# EAGLE board MOTOR_DRIVER (EAGLE 8.0.1)
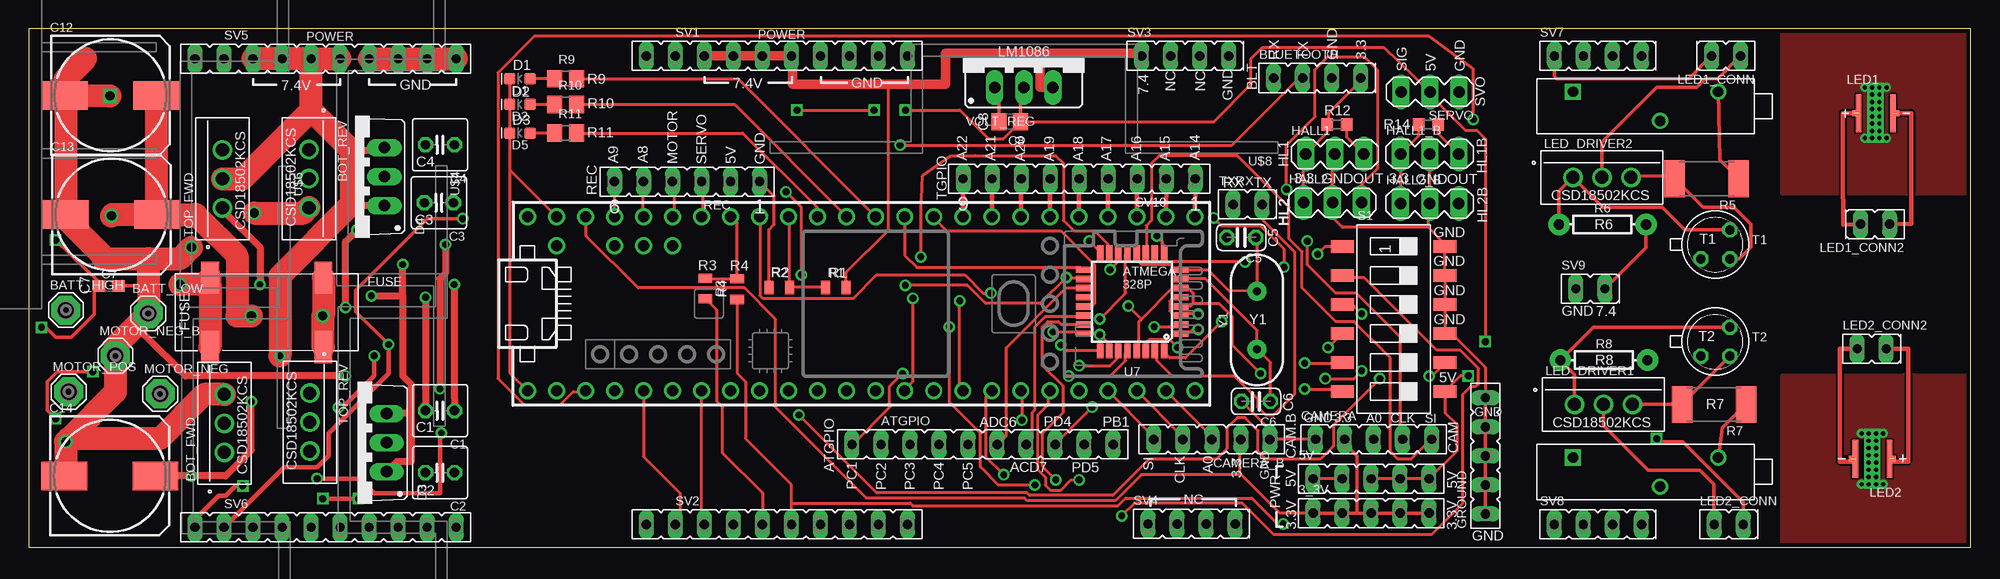
[diagram p0: board, top side]
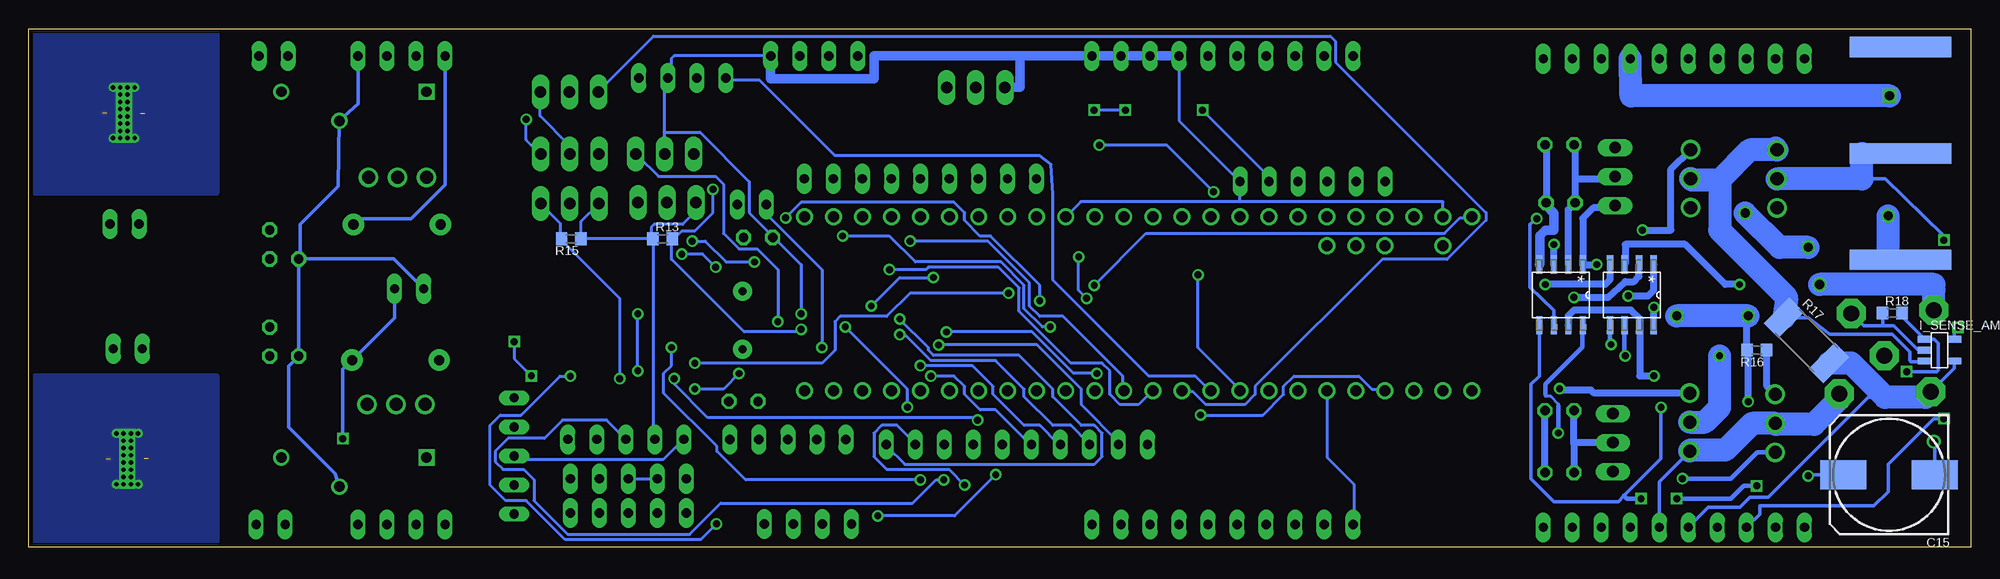
[diagram p1: board, bottom side, seen from below]

Size 170 x 45.39 mm. Coordinates in mm from the lower left corner, seen from the top.
Outline: 0,0 170,0 170,45.39 0,45.39 0,0
Copper layers (1*16): Top 0.035559375mm / dielectric 1.501140625mm / Bottom 0.035559375mm
Design rules "typical_4pcb *": minimum track width 6mil, minimum drill 15mil, track to track 6mil, track to pad 6mil, pad to pad 6mil, via to via 6mil, smd to smd 6mil, copper to edge 15mil, drill to drill 8mil, minimum pad ring 10mil, minimum via ring 8mil, stop-mask expansion 4mil, vias tented up to drill 0mil, thermal gap 10mil
Net classes: 0 default: width 0.152 mm, drill 0.381 mm, clearance 0.152 mm

## Footprints (pad centres in the part's own frame; a part is rotated, then mirrored left to right if it is on the bottom)
FE05-1 = drill 0.813 long: 1 -5.08,0; 2 -2.54,0; 3 0,0; 4 2.54,0; 5 5.08,0
FE10 = drill 0.813 long: 1 -11.43,0; 2 -8.89,0; 3 -6.35,0; 4 -3.81,0; 5 -1.27,0; 6 1.27,0; 7 3.81,0; 8 6.35,0; 9 8.89,0; 10 11.43,0
SE14 = drill 1.397 pad 2.54 octagon: MP 0,0
BIGSWITCH = smd 1.778 x 8.89 bottom: GND 4.65,0; NC 13.97,0; VCC -4.65,0
FE04-1 = drill 0.813 long: 1 -5.08,0; 2 -2.54,0; 3 0,0; 4 2.54,0
KCS3 = drill 1.143 pad 1.651: 1 -5.08,0; 2 -2.54,0; 3 0,0
C025-050X050 = drill 0.813 octagon: 1 -1.27,0; 2 1.27,0
C025-024X044 = drill 0.813 octagon: 1 -1.27,0; 2 1.27,0
C0603 = smd 1.1 x 1: 1 -0.85,0; 2 0.85,0
C0805 = smd 1.3 x 1.5: 1 -0.95,0; 2 0.95,0
153CLV-1010 = smd 4 x 2.5: + 4,0; - -4,0
LED-0603 = smd 1 x 1: A -0.877,0; C 0.877,0
TO220ABS = drill 1.016 long: A1 -2.54,-2.54; A2 2.54,-2.54; C 0,-2.54
FUSEHOLDER3588 = smd 1.57 x 2.82: A -4.96,3.03; B 4.96,3.03; C -4.96,-3.03; D 4.96,-3.03
SOIC-8_M = smd 1.6 x 0.533: 1 -2.654,1.905; 2 -2.654,0.635; 3 -2.654,-0.635; 4 -2.654,-1.905; 5 2.654,-1.905; 6 2.654,-0.635; 7 2.654,0.635; 8 2.654,1.905
MA03-1 = drill 1.016 long: 1 -2.54,0; 2 0,0; 3 2.54,0
SOT23-5 = smd 0.6 x 1.2: 1 -0.95,-1.306; 2 0,-1.306; 3 0.95,-1.306; 4 0.95,1.306; 5 -0.95,1.306
XP = smd 0.5 x 3.3: NEGATIVE 1.5,0; POSITIVE -1.5,0 | smd 0.4 x 0.5: NEGATIVE1 1.85,0; POSITIVE1 -1.85,0 | smd 1.3 x 3.3: THERMAL 0,0
FE02-1 = drill 0.813 long: 1 -5.08,0; 2 -2.54,0
0805 = smd 0.8 x 1.2: 1 -0.9,0; 2 0.9,0
R2512 = smd 1.8 x 3.2: 1 -2.8,0; 2 2.8,0
AXIAL-0.3 = drill 0.9 pad 1.88: P$1 -3.81,0; P$2 3.81,0
R0805 = smd 1.3 x 1.5: 1 -0.95,0; 2 0.95,0
R0603 = smd 1 x 1.1: 1 -0.85,0; 2 0.85,0
FE06 = drill 0.813 long: 1 -6.35,0; 2 -3.81,0; 3 -1.27,0; 4 1.27,0; 5 3.81,0; 6 6.35,0
SMS-006 = smd 1.092 x 2.007: 1 -6.35,-4.496; 2 -3.81,-4.496; 3 -1.27,-4.496; 4 1.27,-4.496; 5 3.81,-4.496; 6 6.35,-4.496; 7 6.35,4.496; 8 3.81,4.496; 9 1.27,4.496; 10 -1.27,4.496; 11 -3.81,4.496; 12 -6.35,4.496
FE09 = drill 0.813 long: 1 -10.16,0; 2 -7.62,0; 3 -5.08,0; 4 -2.54,0; 5 0,0; 6 2.54,0; 7 5.08,0; 8 7.62,0; 9 10.16,0
TO18 = drill 0.813 octagon: 1 -1.27,-1.27; 2 1.27,-1.27; 3 1.27,1.27
TQFP32-08 = smd 1.27 x 0.559: 1 -4.293,2.8; 2 -4.293,2; 3 -4.293,1.2; 4 -4.293,0.4; 5 -4.293,-0.4; 6 -4.293,-1.2; 7 -4.293,-2; 8 -4.293,-2.8; 17 4.293,-2.8; 18 4.293,-2; 19 4.293,-1.2; 20 4.293,-0.4; 21 4.293,0.4; 22 4.293,1.2; 23 4.293,2; 24 4.293,2.8 | smd 0.559 x 1.27: 9 -2.8,-4.293; 10 -2,-4.293; 11 -1.2,-4.293; 12 -0.4,-4.293; 13 0.4,-4.293; 14 1.2,-4.293; 15 2,-4.293; 16 2.8,-4.293; 25 2.8,4.293; 26 2,4.293; 27 1.2,4.293; 28 0.4,4.293; 29 -0.4,4.293; 30 -1.2,4.293; 31 -2,4.293; 32 -2.8,4.293
TEENSY_3.5/3.6_BASIC = drill 0.965: 0/RX -25.4,-7.62; 1/TX -22.86,-7.62; 2 -20.32,-7.62; 3/CANTX -17.78,-7.62; 3V3 7.62,-7.62; 3V3_LO -22.86,7.62; 4/CANRX -15.24,-7.62; 5 -12.7,-7.62; 6 -10.16,-7.62; 7 -7.62,-7.62; 8 -5.08,-7.62; 9/CS -2.54,-7.62; 10/CS 0,-7.62; 11/MOSI 2.54,-7.62; 12/MISO 5.08,-7.62; 13/SCK 5.08,7.62; 14/A0 2.54,7.62; 15/A1 0,7.62; 16/A2 -2.54,7.62; 17/A3 -5.08,7.62; 18/A4/SDA -7.62,7.62; 19/A5/SCL -10.16,7.62; 20/A6 -12.7,7.62; 21/A7 -15.24,7.62; 21/DAC0 12.7,7.62; 22/A8 -17.78,7.62; 23/A9 -20.32,7.62; 24 10.16,-7.62; 25 12.7,-7.62; 26 15.24,-7.62; 27 17.78,-7.62; 28 20.32,-7.62; 29 22.86,-7.62; 30 25.4,-7.62; 31/A12 27.94,-7.62; 32/A13 30.48,-7.62; 33/A14 30.48,7.62; 34/A15 27.94,7.62; 35/A16 25.4,7.62; 36/A17 22.86,7.62; 37/A18 20.32,7.62; 38/A19 17.78,7.62; 39/A20 15.24,7.62; A10 -17.78,5.08; A11 -15.24,5.08; A22/DAC1 10.16,7.62; AGND -25.4,7.62; AREF -20.32,5.08; GND -27.94,-7.62; GND2 7.62,7.62; VIN -27.94,7.62; VUSB -25.4,5.08
POT = drill 0.9 square: P1 1.145,3.175 | drill 0.9: P2 3.685,10.795; P3 1.145,15.875
TO220S = drill 1.016 long: 1 -2.54,-2.54; 2 0,-2.54; 3 2.54,-2.54
HC49US = drill 0.7 pad 1.651: 1 -2.54,0; 2 2.54,0

## Placement (x,y rotation side)
3_3V  [FE05-1]  117.5,3 0 top
5V  [FE05-1]  117.5,6 0 top
ATGPIO  [FE10]  83.5,9 0 top
BATT_HIGH  SE14  [SE14]  3.27,20.76 0 top
BATT_LOW  SE14  [SE14]  10.47,20.46 0 top
BIG_SWITCH  [BIGSWITCH]  6.16,29.81 90 top
BLUETOOTH  [FE04-1]  114.05,41.07 0 top
BOT_FWD  CSD18502KCS_KCS_3  [KCS3]  17.14,13.39 90 top
BOT_REV  CSD18502KCS_KCS_3  [KCS3]  24.54,29.72 270 top
C1  10uF  [C025-050X050]  36.01,11.96 180 top
C2  10uF  [C025-050X050]  36.01,6.54 180 top
C3  10uF  [C025-050X050]  35.91,30.15 180 top
C4  10uF  [C025-050X050]  36.01,35.22 180 top
C5  18 pF  [C025-024X044]  106.14,27.11 180 top
C6  18 pF  [C025-024X044]  107.43,12.77 180 top
C7  [C0603]  7,22.88 0 top
C8  10u  [C0805]  85.88,37.25 180 top
C12  33u  [153CLV-1010]  7.17,39.55 0 top
C13  33u  [153CLV-1010]  7.26,29.11 0 top
C14  33u  [153CLV-1010]  7.12,6.25 0 top
C15  33u  [153CLV-1010]  7.17,6.35 180 bottom
CAMERA  [FE05-1]  117.72,9.45 0 top
CAMERA_B  [FE05-1]  103.55,9.44 180 top
D1  [LED-0603]  43,41 180 top
D2  [LED-0603]  43,38.75 180 top
D3  BYV32  [TO220ABS]  28.8,9.16 90 top
D4  BYV32  [TO220ABS]  28.6,32.44 90 top
D5  [LED-0603]  43,36.25 180 top
FUSE  [FUSEHOLDER3588]  20.85,20.57 0 top
GATE1  MIC4604YM  [SOIC-8_M]  29.68,22.08 270 bottom
GATE2  MIC4604YM  [SOIC-8_M]  35.88,22.08 270 bottom
GROUND  [FE05-1]  127.5,8 90 top
HALL1  [MA03-1]  114.33,34.4 0 top
HALL1_B  [MA03-1]  122.63,34.42 0 top
HALL2  [MA03-1]  114.13,30.16 0 top
HALL2_B  [MA03-1]  122.63,30.08 0 top
I_SENSE_AMP  INA138  [SOT23-5]  2.75,17.25 270 bottom
LED1  CREE_XP  [XP]  161.67,37.98 0 top
LED1_CONN  [FE02-1]  144.75,43 180 top
LED1_CONN2  [FE02-1]  157.8,28.28 180 top
LED2  CREE_XP  [XP]  161.38,7.75 180 top
LED2_CONN  [FE02-1]  152.62,2 0 top
LED2_CONN2  [FE02-1]  165.12,17.38 0 top
LED_DRIVER1  CSD18502KCS_KCS_3  [KCS3]  140.38,12.5 0 top
LED_DRIVER2  CSD18502KCS_KCS_3  [KCS3]  140.25,32.38 0 top
MOTOR_NEG  SE14  [SE14]  11.51,13.43 0 top
MOTOR_NEG_B  SE14  [SE14]  7.6,16.75 0 top
MOTOR_POS  SE14  [SE14]  3.51,13.61 0 top
R1  2.8K  [0805]  70.66,22.74 0 top
R2  1.62K  [0805]  65.7,22.74 0 top
R3  2.32K  [0805]  59.24,22.65 270 top
R4  1.15K  [0805]  62.01,22.59 90 top
R5  1  [R2512]  146.88,32.25 180 top
R6  1k  [AXIAL-0.3]  137.75,28.25 0 top
R7  1  [R2512]  147.5,12.5 180 top
R8  1k  [AXIAL-0.3]  137.88,16.38 0 top
R9  59  [R0805]  47,41 0 top
R10  59  [R0805]  47,38.75 0 top
R11  59  [R0805]  47,36.25 0 top
R12  10k  [R0603]  114.5,37 0 top
R13  10k  [R0603]  114.5,27 0 bottom
R14  10k  [R0603]  122.5,37 0 top
R15  10k  [R0603]  122.5,27 180 bottom
R16  10k  [R0603]  18.75,17.25 180 bottom
R17  10m  [R2512]  14.39,18.11 315 bottom
R18  10k  [R0603]  6.88,20.5 0 bottom
REC  [FE06]  57.62,32 180 top
S1  SWS006  [SMS-006]  119.48,19.99 270 top
SERVO  [MA03-1]  122.66,39.85 180 top
SV1  [FE10]  65.5,43 0 top
SV2  [FE10]  65.5,2 0 top
SV3  [FE04-1]  102.5,43 0 top
SV4  [FE04-1]  103.06,2.05 0 top
SV5  [FE10]  26,42.75 0 top
SV6  [FE10]  26,1.75 0 top
SV7  [FE04-1]  138.62,43 0 top
SV8  [FE04-1]  138.62,2 0 top
SV9  [FE02-1]  140.5,22.62 0 top
SV10  [FE09]  91.95,32.25 180 top
T1  2N2222  [TO18]  147.62,26.5 0 top
T2  2N2222  [TO18]  147.62,18 0 top
TOP_FWD  CSD18502KCS_KCS_3  [KCS3]  16.97,34.78 90 top
TOP_REV  CSD18502KCS_KCS_3  [KCS3]  24.61,8.41 270 top
TXRX  [FE02-1]  110.5,30 0 top
U7  ATMEGA328P_TQFP  [TQFP32-08]  96.58,21.48 180 top
U$1  TEENSY_3.5/3.6_BASIC  [TEENSY_3.5/3.6_BASIC]  71.6,21.32 0 top
U$2  HEATSINK  [HEATSINK]  26.95,32.81 270 top
U$3  POT  [POT]  132,9 270 top
U$4  HEATSINK  [HEATSINK]  27.12,11.16 270 top
U$5  HEATSINK  [HEATSINK]  13.25,32.64 270 top
U$6  HEATSINK  [HEATSINK]  13.39,11.11 270 top
U$7  POT  [POT]  132,41 270 top
U$8  [HEATSINK]  87.12,44 180 top
VOLT_REG  LM1086TO220V  [TO220S]  87.1,42.79 0 top
Y1  16MHz  [HC49US]  107.5,19.88 90 top

## Library data of the parts
3_3V 5V ATGPIO GROUND LED1_CONN LED1_CONN2 LED2_CONN LED2_CONN2 SV1-SV10 TXRX = con-lsta
BATT_HIGH BATT_LOW MOTOR_NEG MOTOR_NEG_B MOTOR_POS = solpad
BIG_SWITCH = bigswitch; DIGIKEY_PART_NUMBER: CW106-ND; MANUFACTURER: CW Industries; MANUFACTURER_PART_NUMBER: GRB238B801BR1; PRICE: $2.86
BLUETOOTH = con-lsta; MANUFACTURER: HC Information Technology; MANUFACTURER_PART_NUMBER: HC-06
BOT_FWD BOT_REV LED_DRIVER1 LED_DRIVER2 TOP_FWD TOP_REV = CSD18502KCS; DIGIKEY_PART_NUMBER: 296-35013-ND; MANUFACTURER: Texas Instruments; MANUFACTURER_PART_NUMBER: CSD18533KCS; PRICE: $1.53
C1-C7 C12-C15 R12-R16 = resistor
C8 R5 R7 R9-R11 R17 R18 = rcl
CAMERA CAMERA_B = con-lsta; DIGIKEY_PART_NUMBER: 28317-ND; MANUFACTURER: Parallax; MANUFACTURER_PART_NUMBER: 28317; PRICE: $49.99
D1 D2 D5 = SparkFun-LED
D3 D4 = diode
FUSE = minifuse; DIGIKEY_PART_NUMBER: F4989-ND; MANUFACTURER: Littelfuse Inc.; MANUFACTURER_PART_NUMBER: 0891010.NXS; PRICE: $0.37
GATE1 GATE2 = MIC4604; DIGIKEY_PART_NUMBER: 576-4395-1-ND; MANUFACTURER: Microchip; MANUFACTURER_PART_NUMBER: MIC4604YM-T5; PRICE: $1.25
HALL1 HALL1_B HALL2 HALL2_B = con-lstb; DIGIKEY_PART_NUMBER: US1881LUA-AAA-000-BU-ND; MANUFACTURER: Melexis Technologies NV; MANUFACTURER_PART_NUMBER: US1881LUA-AAA-000-BU; PRICE: $0.95
I_SENSE_AMP = burr-brown; DIGIKEY_PART_NUMBER: INA138NACT-ND; MANUFACTURER: Texas Instruments; MANUFACTURER_PART_NUMBER: INA138NA/250
LED1 LED2 = Cree_XP
R1 = SparkFun-Resistors; DIGIKEY_PART_NUMBER: 311-2.80KCRCT-ND; MANUFACTURER: Yageo; MANUFACTURER_PART_NUMBER: RC0805FR-072K8L; PRICE: $0.10
R2 = SparkFun-Resistors; DIGIKEY_PART_NUMBER: 311-1.62KCRCT-ND; MANUFACTURER: Yageo; MANUFACTURER_PART_NUMBER: RC0805FR-071K62L; PRICE: $0.10
R3 = SparkFun-Resistors; DIGIKEY_PART_NUMBER: 311-2.32KCRCT-ND; MANUFACTURER: Yageo; MANUFACTURER_PART_NUMBER: RC0805FR-072K32L; PRICE: $0.10
R4 = SparkFun-Resistors; DIGIKEY_PART_NUMBER: 311-1.15KCRCT-ND; MANUFACTURER: Yageo; MANUFACTURER_PART_NUMBER: RC0805FR-071K15L; PRICE: $0.10
R6 R8 = SparkFun-Resistors; PROD_ID: RES-12182
REC = con-lsta; OC_FARNELL: unknown; OC_NEWARK: unknown
S1 = smd-special; DIGIKEY_PART_NUMBER: CT2196MST-ND; MANUFACTURER: CTS Electrocomponents; MANUFACTURER_PART_NUMBER: 219-6MST; PRICE: $0.91
SERVO = con-lstb; MANUFACTURER: TrackStar; MANUFACTURER_PART_NUMBER: TS-P12S; PRICE: $18.41
T1 T2 = transistor
U7 = SparkFun-IC-Microcontroller; DIGIKEY_PART_NUMBER: ATMEGA328PB-AU-ND; MANUFACTURER: Microchip Technology; MANUFACTURER_PART_NUMBER: ATMEGA328PB-AU; PRICE: $1.38
U$1 = Teensy356; DIGIKEY_PART_NUMBER: 1568-1443-ND; MANUFACTURER: SparkFun Electronics; MANUFACTURER_PART_NUMBER: DEV-14055; PRICE: $26.25
U$2 U$4-U$6 = heatsink; DIGIKEY_PART_NUMBER: HS112-ND; MANUFACTURER: Aavid Thermalloy; MANUFACTURER_PART_NUMBER: 507002B00000G; PRICE: $0.26
U$3 U$7 = ledpot
U$8 = heatsink
VOLT_REG = v-reg-3; DIGIKEY_PART_NUMBER: LM1086IT-5.0/NOPB-ND; MANUFACTURER: Texas Instruments; MANUFACTURER_PART_NUMBER: LM1086IT-5.0/NOPB; PRICE: $1.67
Y1 = SparkFun-Clocks; DIGIKEY_PART_NUMBER: 887-2425-1-ND; MANUFACTURER: TXC CORPORATION; MANUFACTURER_PART_NUMBER: 9C-16.000MBBK-T; PRICE: $0.36

## Nets
3_3V: 3_3V.1 3_3V.2 3_3V.3 3_3V.4 3_3V.5 BLUETOOTH.4 CAMERA.2 CAMERA_B.2 HALL1.1 HALL1_B.1 HALL2.1 HALL2_B.1 R12.1 R13.1 R14.1 R15.1 U$1.3V3_LO
5V: 5V.1 5V.2 5V.3 5V.4 5V.5 C8.1 REC.2 S1.7 SERVO.2 VOLT_REG.2
5V_TEENSY: S1.6 U7.4 U7.6 U7.18 U7.29 U$1.VIN
7_4V: R1.2 SV1.3 SV1.4 SV1.5 SV1.6 SV3.1 VOLT_REG.3
7_4V_TOP: BIG_SWITCH.GND C7.1 D3.A1 D3.A2 D4.A1 D4.A2 GATE1.1 GATE2.1 I_SENSE_AMP.5 SV5.3 SV5.4 SV5.5 SV5.6 TOP_FWD.2 TOP_REV.2
7_4V_TOP2: LED1_CONN.2 LED2_CONN.2 R6.P$2 R8.P$2 SV7.1 SV9.2
ADC6: ATGPIO.6 U7.19
ADC7: ATGPIO.7 U7.22
BATT_VOLTAGE: BATT_HIGH.MP FUSE.A FUSE.C
BATT_VOLTAGE_SENSE: R1.1 R2.2 U$1.17/A3
BLT_RX: BLUETOOTH.1 U$1.8
BLT_TX: BLUETOOTH.2 U$1.7
CAMERA_A0: CAMERA.3 U7.23
CAMERA_A0_B: CAMERA_B.3 U$1.31/A12
CAMERA_CL: CAMERA.4 U7.12
CAMERA_CL_B: CAMERA_B.4 U$1.30
CAMERA_SI: CAMERA.5 U7.11
CAMERA_SI_B: CAMERA_B.5 U$1.29
EMF_SENSE_HIGH: R3.1 R4.2 U$1.19/A5/SCL
EMF_SENSE_LOW: S1.5 U$1.18/A4/SDA
GND: BLUETOOTH.3 C5.2 C6.2 C8.2 CAMERA.1 CAMERA_B.1 D1.C D2.C D5.C GROUND.1 GROUND.2 GROUND.3 GROUND.4 GROUND.5 HALL1.2 HALL1_B.2 HALL2.2 HALL2_B.2 R2.1 REC.1 S1.9 S1.10 S1.11 S1.12 SERVO.1 SV1.7 SV1.8 SV1.9 SV1.10 SV3.4 U7.3 U7.5 U7.21 U$1.AGND U$1.GND U$1.GND2 VOLT_REG.1
GND_TOP: BATT_LOW.MP BOT_FWD.3 BOT_REV.3 C7.2 C12.- C13.- C14.- C15.- GATE1.7 GATE2.7 I_SENSE_AMP.2 MOTOR_NEG_B.MP R16.1 R18.1 SV5.7 SV5.8 SV5.9 SV5.10
GND_TOP2: SV7.4 SV9.1 T1.1 T2.1 U$3.P2 U$7.P2
HALL1: HALL1.3 R12.2 U7.32
HALL1_B: HALL1_B.3 R14.2 U$1.1/TX
HALL2: HALL2.3 R13.2 U7.1
HALL2_B: HALL2_B.3 R15.2 U$1.2
HI: SV2.2 U$1.3/CANTX
HI_TOP: GATE1.5 GATE2.6 SV6.2
I_SENSE: SV2.3 U$1.5
I_SENSE_HI_TOP: BOT_REV.2 I_SENSE_AMP.3 R17.1 TOP_FWD.3
I_SENSE_LOW_TOP: I_SENSE_AMP.4 MOTOR_POS.MP R17.2 SV6.5
I_SENSE_TOP: I_SENSE_AMP.1 R18.2 SV6.3
LED1: R9.2 U$1.14/A0
LED1HI: LED1.POSITIVE LED1.POSITIVE1 LED1_CONN2.2
LED1LO: LED1.NEGATIVE LED1.NEGATIVE1 LED1_CONN2.1
LED2: R10.2 U$1.15/A1
LED2HI: LED2.POSITIVE LED2.POSITIVE1 LED2_CONN2.2
LED2LO: LED2.NEGATIVE LED2.NEGATIVE1 LED2_CONN2.1
LED3: R11.2 U$1.16/A2
LI: SV2.1 U$1.4/CANRX
LI2: U$1.6
LI_TOP: GATE1.6 GATE2.5 SV6.1
MOTOR_HIGH: R3.2 SV2.5
MOTOR_LOW: R4.1 S1.8 SV2.6
MOTOR_LOW_TOP: BOT_FWD.2 MOTOR_NEG.MP SV6.6 TOP_REV.3
N$1: R5.1 U$7.P3
N$2: BOT_REV.1 GATE1.8
N$3: GATE1.3 TOP_FWD.1
N$4: C1.1 C2.1 GATE1.4
N$5: C1.2 C2.2 D3.C GATE1.2
N$6: C6.1 U7.7 Y1.1
N$7: C5.1 U7.8 Y1.2
N$8: LED_DRIVER2.3 R5.2 T1.2
N$9: BOT_FWD.1 GATE2.8
N$10: GATE2.3 TOP_REV.1
N$11: C3.1 C4.1 GATE2.4
N$12: C3.2 C4.2 D4.C GATE2.2
N$13: R7.1 U$3.P3
N$16: LED_DRIVER2.1 R6.P$1 T1.3
N$17: LED1_CONN.1 LED_DRIVER2.2
N$18: LED_DRIVER1.3 R7.2 T2.2
N$19: LED_DRIVER1.1 R8.P$1 T2.3
N$20: LED2_CONN.1 LED_DRIVER1.2
N$21: BIG_SWITCH.VCC C12.+ C13.+ C14.+ C15.+ FUSE.B FUSE.D R16.2
N$22: D1.A R9.1
N$23: D2.A R10.1
N$24: D5.A R11.1
PB1: ATGPIO.10 U7.13
PC1: ATGPIO.1 U7.24
PC2: ATGPIO.2 U7.25
PC3: ATGPIO.3 U7.26
PC4: ATGPIO.4 U7.27
PC5: ATGPIO.5 U7.28
PD4: ATGPIO.8 U7.2
PD5: ATGPIO.9 U7.9
PD6: U7.10
REC_EXTRA1: REC.5 U$1.22/A8
REC_EXTRA2: REC.6 U$1.23/A9
REC_MOTOR: REC.4 U$1.21/A7
REC_SERVO: REC.3 U$1.20/A6
RX: TXRX.1 U7.30
SERVO: SERVO.3 U$1.9/CS
SPI_MISO: U7.16 U$1.11/MOSI
SPI_MOSI: U7.15 U$1.12/MISO
SPI_SCK: U7.17 U$1.13/SCK
SPI_SS: U7.14 U$1.10/CS
SW1: S1.1 U$1.24
SW2: S1.2 U$1.25
SW3: S1.3 U$1.26
SW4: S1.4 U$1.27
SW5: U$1.28
TGPIO1: SV10.1 U$1.33/A14
TGPIO2: SV10.2 U$1.34/A15
TGPIO3: SV10.3 U$1.35/A16
TGPIO4: SV10.4 U$1.36/A17
TGPIO5: SV10.5 U$1.37/A18
TGPIO6: SV10.6 U$1.38/A19
TGPIO7: SV10.7 U$1.39/A20
TGPIO8: SV10.8 U$1.21/DAC0
TGPIO9: SV10.9 U$1.A22/DAC1
TX: TXRX.2 U7.31

## Tracks (layer width: path | path; a pad name or v marks a point on that pad's centre or on a via)
3_3V
  Top 0.25: 3_3V.1 109.5,3 106.08,6.42 106,6.5 106,9.42 CAMERA_B.2 | R14.1 121.65,35.99 HALL1_B.1 HALL2_B.1 | HALL2.1 111.59,34.2 HALL1.1 113.65,36.27 R12.1 113.75,37.1 113.75,38 116.59,40.84 BLUETOOTH.4
  Top 0.254: U$1.3V3_LO 48.81,28.83 48.81,27.24 53.35,22.7 62.65,22.7 65.38,19.98 65.38,12.26 73.32,4.31 87.17,4.31 87.4,4.09 95.11,4.09 97.39,6.36 106.01,6.36 106.08,6.42
  Top 0.305: 3_3V.1 3_3V.2 116.25,3 | 116.25,3 3_3V.3 3_3V.4 3_3V.5 | CAMERA.2 115.18,9.07 116.25,8 116.25,3
  Bottom 0.25: HALL2.1 111.59,29.41 112.75,28.25 115.25,28.25 115.5,28 115.5,27.15 R13.1 R15.1 121.65,28.52 HALL2_B.1
  Bottom 0.254: R13.1 115.32,26.79 115.32,9.53 CAMERA.2
5V  (via drill 0.6)
  Top 0.25: 5V.3 5V.4 5V.5 125,8.42 125,10.75 123.98,11.77 S1.7 125.34,15 v126,15 | 5V.2 5V.1 | v67.25,38.25 v74,38.25 | v76.75,38.25 81.5,38.25 84,35.75 85.33,35.75 C8.1 103.75,37.25 107,40.5 107,42.75 108,43.75 118.63,43.75 SERVO.2 122.66,39.59 125.75,36.5 126.75,36.5 127.5,35.75 v127.5,18
  Top 0.305: C8.1 86.83,39.97 VOLT_REG.2
  Bottom 0.25: REC.2 61.44,32.44 v67.25,38.25 | 5V.3 5V.2 | v74,38.25 v76.75,38.25 | v127.5,18 127.5,16.5 v126,15
5V_TEENSY  (via drill 0.6)
  Top 0.254: 97.39,19.98 100.11,22.7 100.79,22.7 U7.6 101.02,22.7 101.47,22.7 101.92,22.25 101.92,21.34 | 97.39,19.98 97.16,19.75 97.16,17.25 U7.29 | 97.39,19.98 v96.25,21.11 | U7.18 92.16,23.61 v90.8,23.61 88.53,21.34 83.77,21.34 82.18,22.93 v76.73,22.93 | 101.92,21.34 101.7,21.11 101.02,21.11 U7.4 | v111.69,13.85 114.86,13.85 S1.6 | v107.83,15.21 105.33,17.71 105.33,20.2 104.19,21.34 101.92,21.34
  Bottom 0.254: v90.8,23.61 93.75,23.61 v96.25,21.11 | v111.69,13.85 109.19,13.85 v107.83,15.21 | v76.73,22.93 72.19,27.47 46.08,27.47 44.72,28.83 43.81,28.83 U$1.VIN
7_4V
  Top 0.25: R1.2 71.56,24.06 75.25,27.75 75.25,40.5
  Top 0.813: 88.5,43.25 80.25,43.25 80.25,40.5 75.25,40.5 66.88,40.5 66.88,42.9 SV1.6 SV1.5 SV1.4 SV1.3 | 88.5,43.25 97.42,43.25 SV3.1 | VOLT_REG.3 88.5,40.25 88.5,43.25
7_4V_TOP  (via drill 0.6)
  Top 0.305: v1.12,19.25 1.5,19.25 2.38,18.38 3.75,18.38 5.75,20.38 5.75,22.48 C7.1 6.15,23.23 v2.38,26.88
  Top 0.61: 32.75,22 v32.75,24.75 | 32.75,22 32.75,15 33.5,14.25 33.5,11.75 | 28.25,34.75 30.91,34.75 D4.A2 | D4.A1 28.35,29.9 28.25,30 | 33.5,11.75 31.39,11.75 D3.A2 | D3.A1 32.22,7.5 33.5,7.5 33.5,11.75 | v30,22 32.75,22
  Top 2: TOP_FWD.2 18.74,32.24 24.75,38.25 | 24.75,38.25 28.25,34.75 28.25,30 22,23.75 v22,16.75 | SV5.5 SV5.6 | SV5.5 SV5.4 SV5.3 | 24.75,38.25 SV5.5
  Bottom 0.305: I_SENSE_AMP.5 1.44,18.93 v1.12,19.25 | v2.38,26.88 2.38,27.25 7.5,32.25 9.53,32.25 9.54,32.24
  Bottom 0.61: D4.A1 31.29,29.75 33,29.75 33.98,28.77 GATE2.1 32.77,24.73 v32.75,24.75 | 27.75,24.76 GATE1.1 27.77,22.48 28.25,22 v30,22
  Bottom 1.27: BIG_SWITCH.GND 9.54,34.46 9.75,34.25
  Bottom 2: TOP_FWD.2 9.54,32.24 9.54,34.46 | TOP_REV.2 23.3,10.95 22,12.25 v22,16.75
7_4V_TOP2  (via drill 0.6)
  Top 0.305: SV7.1 133.54,41.2 133.75,41 145.29,41 LED1_CONN.2 | R6.P$2 141.56,26.23 SV9.2 | LED2_CONN.2 150.09,3.96 144.8,9.25 142.75,9.25 v142.5,9.5
  Bottom 0.305: SV7.1 133.54,31.7 136.5,28.75 141.06,28.75 R6.P$2 | SV9.2 137.96,20.1 R8.P$2 142.5,15.56 v142.5,9.5
ADC6
  Top 0.254: U7.19 92.16,22.7 90.8,22.7 85.58,17.48 85.58,9.76 84.9,9.08 ATGPIO.6
ADC7
  Top 0.254: U7.22 92.16,20.2 88.99,20.2 88.08,19.3 88.08,12.03 87.85,11.8 87.85,9.53 87.4,9.08 ATGPIO.7
BATT_VOLTAGE  (via drill 0.8)
  Top 0.813: 15.89,23 15,23
  Top 2: FUSE.A 15.89,23 FUSE.C | 15,23 v13.25,23
  Bottom 2: BATT_HIGH.MP 3.27,22.5 3.25,22.5 3.25,23 v13.25,23
BATT_VOLTAGE_SENSE
  Top 0.25: U$1.17/A3 66.6,28.86 R2.2 R1.1
BLT_RX
  Bottom 0.254: BLUETOOTH.1 108.96,40.86 106.01,40.86 99.43,34.28 83.77,34.28 81.5,34.25 80.5,33.5 80.36,30.87 80.36,23.38 71.96,14.98 67.88,14.98 66.74,13.85 U$1.8
BLT_TX  (via drill 0.6)
  Top 0.254: v76.27,35.19 105.33,35.19 111,40.86 111.46,40.86 BLUETOOTH.2 | v66.29,31.1 67.65,29.74 v67.65,23.84
  Bottom 0.254: v76.27,35.19 70.37,35.19 v66.29,31.1 | v67.65,23.84 67.65,17.48 64.02,13.85 U$1.7
CAMERA_A0  (via drill 0.6)
  Top 0.254: v89.89,5.9 88.76,7.04 88.76,9.99 90.58,11.8 90.58,14.07 88.76,15.89 88.76,19.3 89.21,19.75 90.12,19.75 90.35,19.52 92.16,19.52 U7.23
  Bottom 0.254: v89.89,5.9 90.58,5.9 92.62,3.86 109.42,3.86 112.14,1.14 122.81,1.14 125.76,4.09 125.76,5.9 126.67,6.81 128.48,6.81 129.16,7.49 129.16,8.4 128.03,9.53 124.85,9.53 123.26,11.12 119.4,11.12 117.81,9.53 CAMERA.3
CAMERA_A0_B
  Top 0.25: CAMERA_B.3 103.55,9.69 U$1.31/A12
CAMERA_CL  (via drill 0.6)
  Top 0.254: v106.47,24.97 100.11,24.97 99.88,24.74 97.39,24.74 97.16,24.97 97.16,25.65 U7.12 | v111.91,26.79 111.91,24.74 114.41,22.25 116.23,22.25 120.08,18.39 120.08,9.53 CAMERA.4
  Bottom 0.254: v106.47,24.97 108.96,24.97 110.78,26.79 v111.91,26.79
CAMERA_CL_B
  Top 0.25: CAMERA_B.4 101.01,9.69 U$1.30
CAMERA_SI
  Top 0.254: U7.11 97.84,25.88 97.84,28.15 98.29,28.6 98.29,33.6 98.97,34.28 105.78,34.28 110.32,29.74 110.32,27.01 111.46,25.88 111.46,22.7 114.41,19.75 116,19.75 119.18,16.57 119.18,8.4 119.86,7.72 120.99,7.72 122.58,9.31 CAMERA.5
CAMERA_SI_B
  Top 0.25: CAMERA_B.5 98.47,9.69 U$1.29
EMF_SENSE_HIGH
  Top 0.25: R3.1 59.3,23.49 R4.2 62.01,28.37 U$1.19/A5/SCL
EMF_SENSE_LOW  (via drill 0.6)
  Top 0.254: v111.69,16.12 114.86,16.12 S1.5 | v84.22,22.25 83.54,22.25 81.95,23.84 74.23,23.84 72.19,21.79 64.24,21.79 64.02,22.02 64.02,28.83 U$1.18/A4/SDA
  Bottom 0.254: v111.69,16.12 100.56,16.12 99.43,17.25 99.43,19.75 98.97,20.2 94.89,20.2 92.84,22.25 v84.22,22.25
GND  (via drill 0.6)
  Top 0.25: D1.C D2.C D5.C 42.12,33.02 | 42.12,33.02 U$1.AGND | 42.12,33.02 42.12,15.24 U$1.GND | R2.1 64.8,27.8 65.25,28.25 65.25,30.73 REC.1 | CAMERA.1 108.69,9.45 CAMERA_B.1 108.63,10.3 C6.2 | GROUND.5 127.5,15.75 124.53,18.72 S1.9 S1.10 S1.11 S1.12 123.98,26.52 122.5,28 | 122.5,28 115,28 114.25,28.75 114.25,30.04 HALL2.2 114.13,34.2 HALL1.2 | 122.5,28 122.5,29.96 HALL2_B.2 HALL1_B.2
  Top 0.254: U7.5 100.79,21.79 100.11,21.79 99.88,21.57 99.88,20.66 100.11,20.43 100.79,20.43 U7.3 101.02,20.43 v102.38,20.43 | U7.21 92.39,21.11 93.07,21.11 93.3,21.34 93.3,24.74 90.35,27.69 80.36,27.69 79.22,28.83 U$1.GND2
  Top 0.305: GROUND.1 GROUND.2 GROUND.3 GROUND.4 GROUND.5 | C8.2 84.92,39.88 VOLT_REG.1
  Bottom 0.25: U$1.AGND 46.2,30.2 46.25,30.25 64,30.25 | 64,30.25 64,31.98 REC.1 69.31,37.34 SV1.7 | 64,30.25 77.91,30.25 U$1.GND2 | HALL1_B.2 122.63,35.13 125.25,37.75 125.25,39.67 SERVO.1 | HALL1.2 114.33,36.32 114.33,40.79 BLUETOOTH.3 113.75,41.37 113.75,42.75 113.5,43 SV3.4
  Bottom 0.254: v102.38,20.43 102.38,24.74 104.65,27.01 C5.2 104.88,27.24 106.92,29.28 106.92,32.01 111.23,36.32 114.33,36.32 114.41,36.32 | CAMERA.1 112.82,9.31 114.41,7.72 127.12,7.72 127.35,7.95 GROUND.3
  Bottom 0.81: SV1.7 SV1.8 SV1.9 SV1.10
  Bottom 0.813: SV1.10 83.25,43 | 83.25,43 96,43 96,41 105.04,41 SV3.4 | VOLT_REG.1 83.25,40.25 83.25,43
GND_TOP  (via drill 0.6, 0.8, 0.8 pad 0.61)
  Top 0.305: C7.2 10.25,22.88 10.5,22.62
  Top 0.4: 9.38,19.37 10.13,18.62 9.47,18.62 MOTOR_NEG_B.MP
  Top 0.61: 10.13,18.62 13.75,15 v27.75,15
  Top 2: C12.- 3.26,39.46 C13.- 3.26,28.74 6.5,25.5 6.5,25.25 10.5,25.25 | C12.- 3.17,40.92 5,42.75 | 3.5,9.5 7.6,13.6 MOTOR_NEG_B.MP 7.6,17.59 9.38,19.37 BATT_LOW.MP 10.5,20.46 10.5,22.62 10.5,25.25 | C14.- 3.25,6.38 v3.25,9.25 3.5,9.5 | BOT_FWD.3 15.39,13.39 11.5,9.5 3.5,9.5 | 10.5,25.25 13.25,25.25 v14.25,26.25 | v19.75,29.25 24.07,29.25 BOT_REV.3 | C12.- v7.12,39.5 | SV5.7 SV5.8 SV5.9 SV5.10
  Bottom 0.305: C15.- 3.17,9.17 v3.25,9.25 | I_SENSE_AMP.2 4.62,17.25 6.75,19.38 7.62,19.38 | 7.62,19.38 9.38,19.38 BATT_LOW.MP | R18.1 7.72,19.48 7.62,19.38
  Bottom 0.61: 29,19.38 29,15 v27.75,15 | 29,19.38 GATE1.7 | GATE2.7 35.25,20.25 34.75,20.75 29.75,20.75 29,20 29,19.38 | R16.1 17.9,14.15 BOT_FWD.3
  Bottom 2: v14.25,26.25 16.75,26.25 v19.75,29.25 | v7.12,39.5 29.75,39.5 SV5.7
GND_TOP2
  Bottom 0.305: U$3.P2 143.17,6.42 147.25,10.5 147.25,15.84 T2.1 T1.1 | SV7.4 141.16,38.82 U$7.P2 142.92,31.58 146.25,28.25 146.25,25.34 T1.1 | T1.1 138.03,25.23 SV9.1
HALL1  (via drill 0.6)
  Top 0.25: R12.2 115.35,35.92 HALL1.3
  Top 0.254: v104.42,19.75 101.24,16.57 99.88,16.57 99.43,17.02 U7.32
  Bottom 0.254: v104.42,19.75 104.42,24.29 106.24,26.11 107.83,26.11 109.19,27.47 109.19,31.78 109.87,32.46 114.86,32.46 116.68,34.28 HALL1.3
HALL1_B  (via drill 0.6)
  Top 0.25: R14.2 123.35,36.24 HALL1_B.3
  Top 0.254: v126.44,37.45 126.44,41.88 122.58,44.72 44.27,44.72 41.09,41.54 41.09,14.76 43.36,12.48 46.54,12.48 47.67,13.62 48.58,13.62 U$1.1/TX
  Bottom 0.254: v126.44,37.45 126.44,35.64 125.31,34.5 HALL1_B.3
HALL2  (via drill 0.6)
  Top 0.254: v102.38,19.07 101.92,19.07 101.7,18.84 101.02,18.84 U7.1 | v110.1,31.33 110.1,35.19 112.59,37.68 112.59,41.77 113.73,42.9 116.91,42.9 118.04,41.77 118.04,33.14 116.68,31.78 116.68,30.19 HALL2.3
  Bottom 0.254: v102.38,19.07 102.61,18.84 107.37,18.84 113.73,25.2 113.73,26.79 R13.2 113.5,27.01 112.82,27.69 111.69,27.69 110.1,29.28 v110.1,31.33
HALL2_B  (via drill 0.6)
  Top 0.254: v67.42,11.58 74.23,4.77 87.4,4.77 87.62,4.54 94.89,4.54 98.07,7.72 103.97,7.72 104.88,8.63 104.88,10.44 105.78,11.35 106.47,11.35 107.6,10.21 107.6,8.4 108.28,7.72 113.05,7.72 114.18,8.85 114.18,10.67 v118.27,14.76
  Bottom 0.254: HALL2_B.3 125.08,29.96 123.49,28.38 123.49,27.01 R15.2 123.26,26.79 118.27,21.79 v118.27,14.76 | v67.42,11.58 61.97,11.58 60.16,13.39 60.16,14.07 59.25,14.98 53.57,14.98 52.44,13.85 51.3,13.85 U$1.2
HI
  Top 0.25: U$1.3/CANTX 53.82,7.93 57,4.75 57,2.39 SV2.2
HI_TOP  (via drill 0.6, 0.6 pad 0.61)
  Top 0.305: v38,28.75 34.88,28.75 28.62,22.5 28.62,20.62 v31.5,17.75
  Top 0.4: v31.5,17.75 31.5,15.25 26.25,10 26.25,8 25.25,7 22.36,7 SV6.2
  Bottom 0.305: GATE2.6 36.52,20.77 38.62,22.75 38.62,28.25 v38,28.75
  Bottom 0.4: GATE1.5 31.59,17.84 v31.5,17.75
I_SENSE
  Top 0.254: 58.9,2.25 U$1.5
  Top 0.406: SV2.3 58.9,2.25
I_SENSE_HI_TOP
  Bottom 0.305: R17.1 14.22,20.09 12.38,18.62 6.88,18.62 5.38,17.12 5.38,16.38 5.25,16.25 4.11,16.25 I_SENSE_AMP.3
  Bottom 2: R17.1 16.12,21.87 22,27.75 22,32.12 | 22,32.12 24.4,32.12 BOT_REV.2 | 17.11,34.92 TOP_FWD.3 19.34,34.78 22,32.12
I_SENSE_LOW_TOP
  Bottom 0.305: I_SENSE_AMP.4 1.44,15.68 MOTOR_POS.MP | 7.5,13.12 9,13.12 17.75,4.38 19.38,4.38 20.25,3.5 22.98,3.5 SV6.5
  Bottom 2: R17.2 10.51,16.13 7.5,13.12 4,13.12 MOTOR_POS.MP 3.65,13.75
I_SENSE_TOP  (via drill 0.6)
  Top 0.305: v5.62,15.38 2.5,15.38 1.62,14.5 1.62,12 v2.38,11.25
  Bottom 0.305: R18.2 6.03,20.17 I_SENSE_AMP.1 3.2,18.2 2.88,17.88 2.88,15.5 3,15.38 v5.62,15.38 | SV6.3 18.5,2.9 18.5,3.62 8.5,3.62 7.25,4.88 7.25,7.25 3.25,11.25 v2.38,11.25
LED1
  Top 0.25: R9.2 62.08,41 U$1.14/A0
LED1HI  (1 unrouted)
  Top 0.406: LED1.POSITIVE 158.8,37.98 158.8,32.73 158.84,28.23 LED1_CONN2.2
LED1LO  (1 unrouted)
  Top 0.406: LED1.NEGATIVE 164.8,37.98 164.8,32.73 164.78,28.33 LED1_CONN2.1
LED2
  Top 0.25: R10.2 61.79,38.75 U$1.15/A1
LED2HI  (1 unrouted)
  Top 0.406: LED2_CONN2.2 164.5,17.38 164.5,7.5 163.22,7.5 LED2.POSITIVE1
LED2LO  (1 unrouted)
  Top 0.406: LED2_CONN2.1 158.5,17.38 158.5,7.5 159.53,7.5 LED2.NEGATIVE1
LED3
  Top 0.25: U$1.16/A2 69,29 69,29.75 62.5,36.25 R11.2
LI
  Bottom 0.25: U$1.4/CANRX 56.36,7.86 54,5.5 54,2.07 SV2.1
LI_TOP  (via drill 0.6, 0.6 pad 0.61)
  Top 0.4: v30.25,16.75 30.25,15 27.5,12.25 v27.12,12.25
  Top 0.406: SV6.1 14.57,2.44 16.62,4.5 17.25,4.5 18.12,5.38 v18.75,5.38 | v25.75,4.25 v28.88,4.25
  Bottom 0.305: GATE2.5 37.78,14.96 38.5,14.25 38.5,6 36.5,4 30.88,4 30.38,4.5 27.12,7.75 v27.12,12.25
  Bottom 0.4: GATE1.6 30.32,16.82 v30.25,16.75
  Bottom 0.406: v18.75,5.38 19.88,5.38 21,4.25 v25.75,4.25 | v28.88,4.25 30.12,4.25 30.38,4.5
MOTOR_HIGH
  Top 0.25: R3.2 60.25,20.74 60.25,12.75 60.75,12.25 60.75,8.25 64.23,4.77 SV2.5
MOTOR_LOW  (via drill 0.6)
  Top 0.25: R4.1 62.01,15.24 62.75,14.5 62.75,9.5 66.75,5.5 66.75,3.86 66.75,2.02 SV2.6
  Top 0.254: v122.58,14.98 122.81,14.98 123.94,16.12 S1.8 | v109.8,2.05 109.32,2.05 107.06,4.31 96.02,4.31 95.34,3.63 77.41,3.63 77.18,3.86 66.75,3.86 66.74,3.86
  Bottom 0.254: v122.58,14.98 123.49,14.98 126.89,11.58 128.71,11.58 129.62,10.67 129.62,5.45 128.26,4.09 126.44,4.09 123.04,0.68 111.17,0.68 v109.8,2.05
MOTOR_LOW_TOP
  Bottom 0.305: SV6.6 27.27,5.75 TOP_REV.3
  Bottom 2: MOTOR_NEG.MP 11.51,12.99 13.75,10.75 17.04,10.75 BOT_FWD.2 19.15,10.85 21.5,8.5 24.52,8.5 TOP_REV.3
N$1
  Top 0.305: U$7.P3 148,33.92 R5.1
N$2  (via drill 0.6)
  Top 0.61: v28.75,27.75 27.75,26.75 v27.75,21
  Bottom 0.61: GATE1.8 27.77,20.73 v27.75,21 | v28.75,27.75 26.25,27.75 26.25,33.09 BOT_REV.1
N$3  (via drill 0.6)
  Top 0.61: TOP_FWD.1 16.97,29.53 20.25,26.25 v20.25,23
  Bottom 0.61: v20.25,23 21.5,23 25,26.5 30.25,26.5 30.25,24.8 GATE1.3
N$4  (via drill 0.6)
  Top 0.61: v37.25,23 37.25,13.99 C1.1
  Bottom 0.61: C2.1 C1.1 | GATE1.4 31.59,23.41 32,23 v37.25,23
N$5  (via drill 0.6)
  Top 0.61: v34.75,21.88 34.75,13.97 C1.2
  Bottom 0.61: 34.74,9 C2.2 | 34.74,9 C1.2 | GATE1.2 29.05,23.7 29.5,23.25 30.25,23.25 31.75,21.88 v34.75,21.88 | D3.C 34.58,9.16 34.74,9
N$6
  Top 0.25: C6.1 108.7,16.18 Y1.1 107.52,18.98 103,23.5 100.89,23.5 U7.7
N$7
  Top 0.25: C5.1 107.52,27.01 Y1.2 105.06,22.44 103.25,24.25 100.9,24.25 U7.8
N$8
  Top 0.254: LED_DRIVER2.3 140.29,32.46 143.92,32.46 R5.2
  Top 0.305: T1.2 149.73,25.23 150.75,26.25 150.75,28.25 149.25,29.75 146.57,29.75 R5.2
N$9  (via drill 0.6)
  Top 0.4: v25.25,6 29,6 30.25,4.75 36,4.75 36,9.75 v36.12,10
  Bottom 0.254: 37.25,13.38 37.23,13.22 36.77,13.22 36.09,12.54 36.12,12.38
  Bottom 0.4: BOT_FWD.1 18.69,8.31 21,6 v25.25,6 | 36.12,12.38 v36.12,10 | 37.25,13.38 37.25,14.25 34,17.5 34,19.4 GATE2.8
N$10  (via drill 0.6)
  Top 0.61: v36.5,26.5 36.5,24 36,23.5 v36,13.88
  Bottom 0.61: GATE2.3 36.52,26.48 v36.5,26.5 | TOP_REV.1 32.99,13.49 33.25,13.75 35.88,13.75 v36,13.88
N$11
  Bottom 0.61: C3.1 37.18,35.12 C4.1
  Bottom 0.813: C3.1 37.18,29.93 36.5,29.25 36.5,27.75 37.25,27.75 37.75,27.25 37.75,24.77 GATE2.4
N$12
  Bottom 0.61: GATE2.2 35.24,29.55 C3.2 34.64,32.25 | 34.64,32.25 34.64,35.12 C4.2 | 34.64,32.25 31.33,32.25 D4.C
N$13
  Top 0.305: U$3.P3 148.25,10.45 R7.1
N$16
  Top 0.305: R6.P$1 133.94,31.14 LED_DRIVER2.1 137.79,29.75 143,29.75 144.98,27.77 T1.3
N$17
  Top 0.305: LED_DRIVER2.2 137.71,35.46 142.5,40.25 146,40.25 146.75,41 147.83,41 LED1_CONN.1
N$18
  Top 0.305: T2.2 144.7,12.54 R7.2 LED_DRIVER1.3
N$19
  Top 0.305: T2.3 136.96,19.27 R8.P$1 135.29,15.14 LED_DRIVER1.1
N$20
  Top 0.305: LED_DRIVER1.2 137.84,10.66 141.75,6.75 146.25,6.75 147.5,5.5 147.5,2.04 LED2_CONN.1
N$21  (via drill 0.6, 0.6 pad 0.61, 0.8)
  Top 0.61: C14.+ v14.25,6.25 17.25,6.25 19.5,8.5 v19.5,12.75
  Top 2: C12.+ 11.17,29.2 C13.+ | C13.+ 7.36,29.11 v7.25,29 | C13.+ 14.64,29.11 18.25,25.5 18.25,20.25 v19.5,20.25 | FUSE.D 25.75,17.59 v25.75,20.25 25.81,20.31 FUSE.B
  Bottom 0.305: C15.+ 14.15,6.35 v14.25,6.25
  Bottom 0.61: v19.5,12.75 19.5,17.15 R16.2 19.6,20.15 v19.5,20.25
  Bottom 1.016: BIG_SWITCH.VCC 7.25,26.25
  Bottom 2: 7.25,26.25 v7.25,29 | v19.5,20.25 v25.75,20.25
N$22
  Top 0.25: R9.1 D1.A
N$23
  Top 0.25: D2.A R10.1
N$24
  Top 0.25: R11.1 D5.A
PB1  (via drill 0.6)
  Top 0.254: v93.75,19.98 96.02,22.25 96.02,25.65 U7.13
  Bottom 0.254: v93.75,19.98 91.26,17.48 91.26,17.25 90.8,16.8 83.31,16.8 80.36,13.85 80.36,13.17 77.86,10.67 76.73,10.67 76.05,9.99 76.05,7.95 76.73,7.26 93.3,7.26 94.89,8.85 ATGPIO.10
PC1  (via drill 0.6)
  Top 0.254: v89.67,18.84 92.16,18.84 U7.24 | v76.5,15.21 75.37,14.07 75.37,12.26 72.19,9.08 ATGPIO.1
  Bottom 0.254: v89.67,18.84 82.18,18.84 78.54,15.21 v76.5,15.21
PC2  (via drill 0.6)
  Top 0.254: v90.35,17.71 90.8,17.25 93.75,17.25 U7.25
  Bottom 0.254: v90.35,17.71 81.72,17.71 77.86,13.85 77.86,12.48 74.46,9.08 ATGPIO.2
PC3  (via drill 0.6)
  Top 0.254: v93.75,18.61 94.43,17.93 94.43,17.25 U7.26
  Bottom 0.254: v93.75,18.61 93.3,18.61 91.03,16.34 85.35,16.34 82.86,13.85 82.86,13.17 80.36,10.67 78.77,10.67 77.18,9.08 ATGPIO.3
PC4  (via drill 0.6)
  Top 0.254: v91.94,15.89 94.66,15.89 95.34,16.57 95.34,17.02 U7.27
  Bottom 0.254: v91.94,15.89 87.4,15.89 85.58,14.07 85.58,13.39 82.86,10.67 81.5,10.67 79.91,9.08 ATGPIO.4
PC5  (via drill 0.6)
  Top 0.254: v91.03,14.98 94.66,14.98 96.02,16.34 96.02,17.02 U7.28
  Bottom 0.254: v91.03,14.98 88.99,14.98 88.08,14.07 88.08,13.39 86.72,12.03 85.35,12.03 82.4,9.08 ATGPIO.5
PD4  (via drill 0.6)
  Top 0.254: v98.52,19.3 100.79,19.3 U7.2 | v93.07,12.26 89.89,9.08 ATGPIO.8
  Bottom 0.254: v98.52,19.3 93.07,13.85 v93.07,12.26
PD5  (via drill 0.6)
  Top 0.254: v98.75,27.24 99.2,26.79 99.2,25.88 U7.9 | v80.59,19.3 80.59,12.71 83.31,9.99 83.31,7.04 84.9,5.45 v88.08,5.45
  Bottom 0.254: v98.75,27.24 94.66,27.24 92.39,24.97 84.9,24.97 82.86,22.93 82.86,20.88 81.27,19.3 v80.59,19.3 | v88.08,5.45 89.44,6.81 94.89,6.81 96.02,7.95 96.02,9.99 95.34,10.67 93.98,10.67 92.39,9.08 ATGPIO.9
REC_EXTRA1
  Top 0.254: REC.5 53.8,31.78 53.8,29.06 U$1.22/A8
REC_EXTRA2
  Top 0.254: REC.6 51.3,31.78 51.3,29.06 U$1.23/A9
REC_MOTOR
  Top 0.254: REC.4 56.52,31.78 56.52,29.06 U$1.21/A7
REC_SERVO
  Top 0.254: REC.3 59.02,31.78 59.02,29.06 U$1.20/A6
RX  (via drill 0.6)
  Top 0.254: v100.56,17.48 99.88,18.16 98.07,18.16 97.84,17.93 97.84,17.25 U7.30
  Bottom 0.254: v100.56,17.48 100.56,24.29 105.33,29.06 105.33,29.96 TXRX.1
SERVO
  Bottom 0.254: U$1.9/CS 69.01,13.62 68.1,13.62 66.97,12.48 63.56,12.48 62.65,13.39 62.65,14.07 51.53,25.2 45.86,25.2 42.45,28.6 42.45,29.28 55.62,42.45 55.62,44.27 56.07,44.72 115.32,44.72 120.08,39.95 SERVO.3
SPI_MISO  (via drill 0.6)
  Top 0.254: v92.84,26.79 93.75,25.88 U7.16
  Bottom 0.254: v92.84,26.79 86.03,26.79 82.4,23.15 82.4,21.11 81.5,20.2 79.45,20.2 74.23,14.98 74.23,13.85 U$1.11/MOSI
SPI_MOSI  (via drill 0.6)
  Top 0.254: v78.09,25.42 78.09,29.5 | 78.09,29.5 78.09,29.51 | v77.41,21.79 77.41,14.53 76.73,13.85 U$1.12/MISO | U7.15 94.43,25.88 94.43,26.56 93.3,27.69 91.48,27.69 90.58,28.6 90.58,33.6 89.89,34.28 82.86,34.28 80.75,34.25 78.25,32.5 78.09,29.5
  Bottom 0.254: v78.09,25.42 78.09,22.47 v77.41,21.79
SPI_SCK
  Top 0.25: U$1.13/SCK 76.68,25.57 77.75,24.5 92.07,24.5 U7.17
SPI_SS  (via drill 0.6)
  Top 0.254: v94.66,24.29 95.34,24.97 95.34,25.65 U7.14
  Bottom 0.254: v94.66,24.29 91.48,24.29 91.26,24.52 85.13,24.52 83.31,22.7 83.31,20.66 78.77,16.12 76.05,16.12 75.37,15.44 75.37,13.39 74.46,12.48 72.87,12.48 71.73,13.62 U$1.10/CS
SW1  (via drill 0.6)
  Top 0.254: v112.82,25.65 113.5,26.33 114.86,26.33 S1.1 | v109.87,24.52 109.87,26.11 107.83,28.15 104.42,28.15 v103.74,28.83 | v81.5,21.57 81.5,14.07 81.72,13.85 U$1.24
  Bottom 0.254: v112.82,25.65 111,25.65 v109.87,24.52 | v103.74,28.83 102.38,30.19 88.99,30.19 88.08,29.28 88.08,28.6 86.72,27.24 85.81,27.24 81.5,22.93 v81.5,21.57
SW2  (via drill 0.6)
  Top 0.25: 96.93,3.86 96.78,3.86 v95.67,2.75
  Top 0.254: 96.93,3.86 106.23,3.86 108.95,1.14 122.81,1.14 125.53,3.86 125.53,13.39 126.21,14.07 126.67,14.07 126.89,14.3 126.89,15.66 125.31,17.25 123.26,17.25 116.91,23.61 115.09,23.61 S1.2 | v85.35,6.36 83.77,7.95 83.77,13.17 84.22,13.62 U$1.25
  Bottom 0.254: v85.35,6.36 88.96,2.75 v95.67,2.75
SW3  (via drill 0.6)
  Top 0.254: v116.68,20.43 116,21.11 115.09,21.11 S1.3 | v116.68,15.44 116,14.76 v113.5,14.76 | v86.94,11.12 86.94,13.62 U$1.26
  Bottom 0.254: v116.68,15.44 v116.68,20.43 | v113.5,14.76 113.5,14.3 110.55,11.35 87.17,11.35 v86.94,11.12
SW4  (via drill 0.6)
  Top 0.254: v113.73,17.48 114.86,18.61 S1.4 | v91.94,5.9 91.26,5.9 90.35,4.99 89.44,4.99 88.99,5.45 88.99,6.13 88.31,6.81 88.31,11.58 89.21,12.48 89.21,13.62 U$1.27
  Bottom 0.254: v113.73,17.48 113.73,15.89 114.41,15.21 114.41,13.49 109.74,8.83 109.74,8.4 107.25,5.9 v91.94,5.9
TGPIO1
  Top 0.406: SV10.1 U$1.33/A14
TGPIO2
  Top 0.406: SV10.2 U$1.34/A15
TGPIO3
  Top 0.406: SV10.3 U$1.35/A16
TGPIO4
  Top 0.406: SV10.4 U$1.36/A17
TGPIO5
  Top 0.406: SV10.5 U$1.37/A18
TGPIO6
  Top 0.406: SV10.6 U$1.38/A19
TGPIO7
  Top 0.406: SV10.7 U$1.39/A20
TGPIO8
  Top 0.406: SV10.8 U$1.21/DAC0
TGPIO9
  Top 0.406: SV10.9 U$1.A22/DAC1
THERM1  (via drill 0.38 pad 0.01)
  other vias: 160.71,40.25 161.34,40.25 161.98,40.25 162.61,40.25 161.34,39.61 161.98,39.61 161.34,38.98 161.98,38.98 161.34,38.34 161.98,38.34 161.34,37.71 161.98,37.71 161.34,37.07 161.98,37.07 161.34,36.44 161.98,36.44 160.71,35.8 161.34,35.8 161.98,35.8 162.61,35.8
  pour Bottom: 153.5,45 169.5,45 169.5,31 153.5,31
  pour Top: 153.5,45 153.5,31 169.5,31 169.5,45
THERM2  (via drill 0.38 pad 0.05)
  other vias: 161.04,7.42 161.68,7.42 161.04,6.79 161.68,6.79 161.04,6.16 161.68,6.16 160.41,5.52 161.04,5.52 161.68,5.52 162.31,5.52 161.04,8.06 161.68,8.06 161.04,8.7 161.68,8.7 161.04,9.33 161.68,9.33 161.04,9.96 160.41,9.96 162.31,9.96 161.69,9.96
  pour Top: 153.5,15 153.5,0.5 169.5,0.5 169.5,15
  pour Bottom: 153.5,15 169.5,15 169.5,0.5 153.5,0.5
TX
  Top 0.254: U7.31 98.75,17.02 98.75,16.34 100.11,14.98 105.56,14.98 107.6,12.94 107.6,12.26 108.28,11.58 108.96,11.58 110.78,13.39 110.78,25.88 108.05,28.6 108.05,29.96 TXRX.2

## Text on the board
tPlace: POWER | POWER | LM1086 | RX | TX | GND | 3.3 | D1 | SIG | 5V | GND | R9 | 7.4V | GND | 7.4V | GND | 7.4 | NC | NC | BLT | D2 | GND | SVO | R10 | D3 | R11 | C8 | A9 | A8 | MOTOR | SERVO | 5V | GND | A22 | A21 | A20 | A19 | A18 | A17 | A16 | A15 | A14 | C4 | HL1 | HL1B | 3.3 | GND | OUT | 3.3 | GND | OUT | REC | RX | TX | TGPIO | C3 | HL2 | HL2B | R6 | GND | T1 | C5 | GND | R3 | R4 | R2 | R1 | ATMEGA / 328P | C7 | GND | GND | 7.4 | FUSE | Y1 | GND | T2 | R8 | 5V | C6 | R7 | PD4 | PB1 | GND | 3.3 | A0 | CLK | SI | GND | C1 | ADC6 | CAM.B | CAM | ATGPIO | ACD7 | PD5 | SI | CLK | A0 | 3.3 | GND | C2 | PC1 | PC2 | PC3 | PC4 | PC5 | 5V | 5V | NC | PWR | 3.3V | 3.3V | GND